# EAGLE board Otomasyon_kart (EAGLE 9.6.2)

Size 160 x 100 mm. Coordinates in mm from the lower left corner, seen from the top.
Outline: 0,0 160,0 160,100 0,100 0,0
Copper layers (1*16): Top 0.035mm / dielectric 1.5mm / Bottom 0.035mm
Design rules "default *": minimum track width 6mil, minimum drill 0.35mm, track to track 25mil, track to pad 6mil, pad to pad 6mil, via to via 6mil, smd to smd 6mil, copper to edge 100mil, drill to drill 50mil, minimum pad ring 10mil, minimum via ring 8mil, stop-mask expansion 4mil, vias tented up to drill 0mil, thermal gap 10mil

## Footprints (pad centres in the part's own frame; a part is rotated, then mirrored left to right if it is on the bottom)
1X03 = drill 1.016 pad 1.88: 1 0,0; 2 2.54,0; 3 5.08,0
1X04 = drill 1.016 pad 1.88: 1 0,0; 2 2.54,0; 3 5.08,0; 4 7.62,0
1X05 = drill 1.016 pad 1.88: 1 0,0; 2 2.54,0; 3 5.08,0; 4 7.62,0; 5 10.16,0
1X08 = drill 1.016 pad 1.88: 1 0,0; 2 2.54,0; 3 5.08,0; 4 7.62,0; 5 10.16,0; 6 12.7,0; 7 15.24,0; 8 17.78,0
1X06_LOCK = drill 1.016 pad 1.88: 1 0,0; 2 2.54,-0.254; 3 5.08,0; 4 7.62,-0.254; 5 10.16,0; 6 12.7,-0.254
ARDUINO_NANO = drill 0.6: 3V3 -2.54,2.54; 5V@1 -2.54,-10.16; A0 -2.54,0; A1 -2.54,-1.27; A2 -2.54,-2.54; A3 -2.54,-3.81; A4 -2.54,-5.08; A5 -2.54,-6.35; A6 -2.54,-7.62; A7 -2.54,-8.89; D2 5.08,-8.89; D3 5.08,-7.62; D4 5.08,-6.35; D5 5.08,-5.08; D6 5.08,-3.81; D7 5.08,-2.54; D8 5.08,-1.27; D9 5.08,0; D10 5.08,1.27; D11 5.08,2.54; D12 5.08,3.81; D13 -2.54,3.81; GND@1 -2.54,-12.7; GND@2 5.08,-10.16; REF -2.54,1.27; RST@1 -2.54,-11.43; RST@2 5.08,-11.43; RX0 5.08,-12.7; TX1 5.08,-13.97; VIN -2.54,-13.97

## Placement (x,y rotation side)
J1  [1X03]  87.63,36.83 270 top
J2  [1X04]  38.1,33.02 90 top
J3  [1X05]  17.78,30.48 90 top
J4  [1X03]  55.88,16.51 180 top
J5  [1X08]  69.85,73.66 180 top
J6  [1X06_LOCK]  109.22,45.72 270 top
U$1  ARDUINO_NANO  [ARDUINO_NANO]  59.69,46.99 0 top

## Library data of the parts
J1 J3 J4 J6 = SparkFun-Connectors
J2 = SparkFun-Connectors; PROD_ID: CONN-09696
J5 = SparkFun-Connectors; PROD_ID: CONN-08438
U$1 = El_yapimi

## Nets
3V3: J5.8 U$1.3V3
5V: J1.2 J2.2 J3.1 J4.3 J6.5 U$1.5V@1
BT_RX: J6.3 U$1.D7
BT_TX: J6.2 U$1.D8
EKRAN_SCL: J2.4 U$1.A5
EKRAN_SDA: J2.3 U$1.A4
GND: J1.3 J2.1 J3.5 J4.2 J5.6 J6.4 U$1.GND@1 U$1.GND@2
KART_MISO: J5.4 U$1.D12
KART_MOSI: J5.3 U$1.D11
KART_RST: J5.7 U$1.D9
KART_SCK: J5.2 U$1.D13
KART_SDA: J5.1 U$1.D10
KIZIL_OTESI: J4.1 U$1.D3
POT: J3.3 U$1.A1
ROLE: J1.1 U$1.D2
SICAKLIK: U$1.A0

## Tracks (layer width: path | path; a pad name or v marks a point on that pad's centre or on a via)
3V3  (1 unrouted)
5V  (5 unrouted)
BT_RX  (1 unrouted)
BT_TX  (1 unrouted)
EKRAN_SCL  (1 unrouted)
EKRAN_SDA  (1 unrouted)
GND  (7 unrouted)
KART_MISO  (1 unrouted)
KART_MOSI  (1 unrouted)
KART_RST  (1 unrouted)
KART_SCK  (1 unrouted)
KART_SDA  (1 unrouted)
KIZIL_OTESI  (1 unrouted)
POT  (1 unrouted)
ROLE  (1 unrouted)